# EAGLE board Quad-4layer (EAGLE 9.5.1)
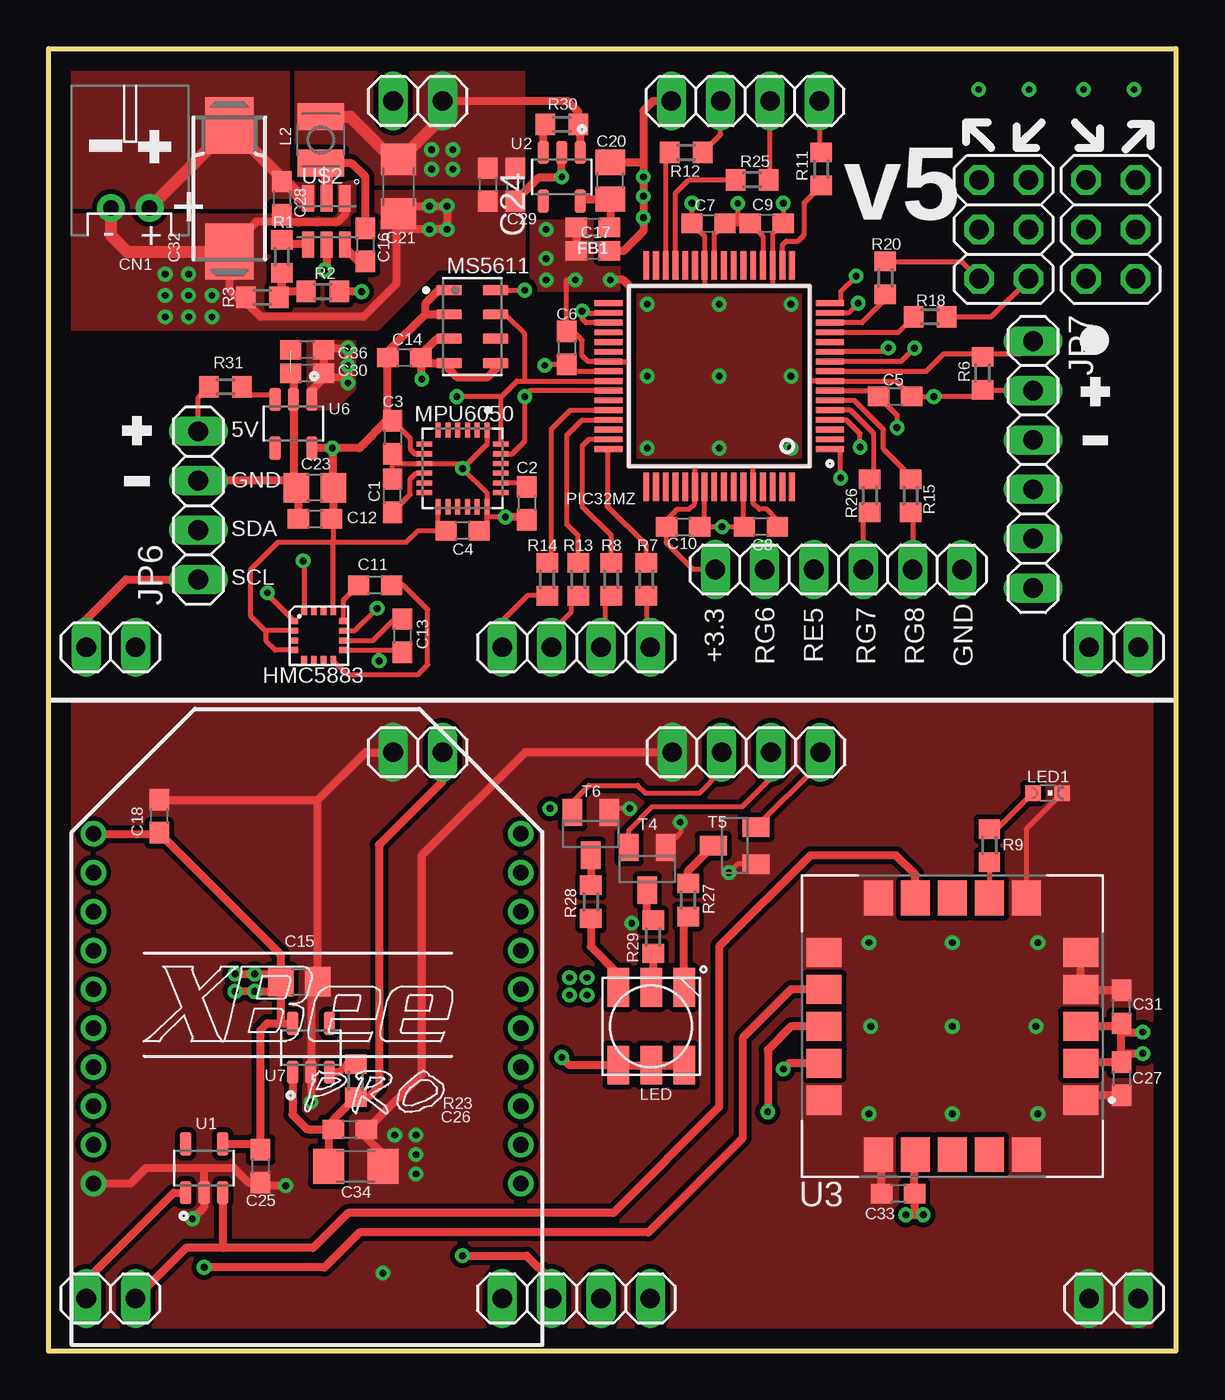
[diagram p0: board, top side]
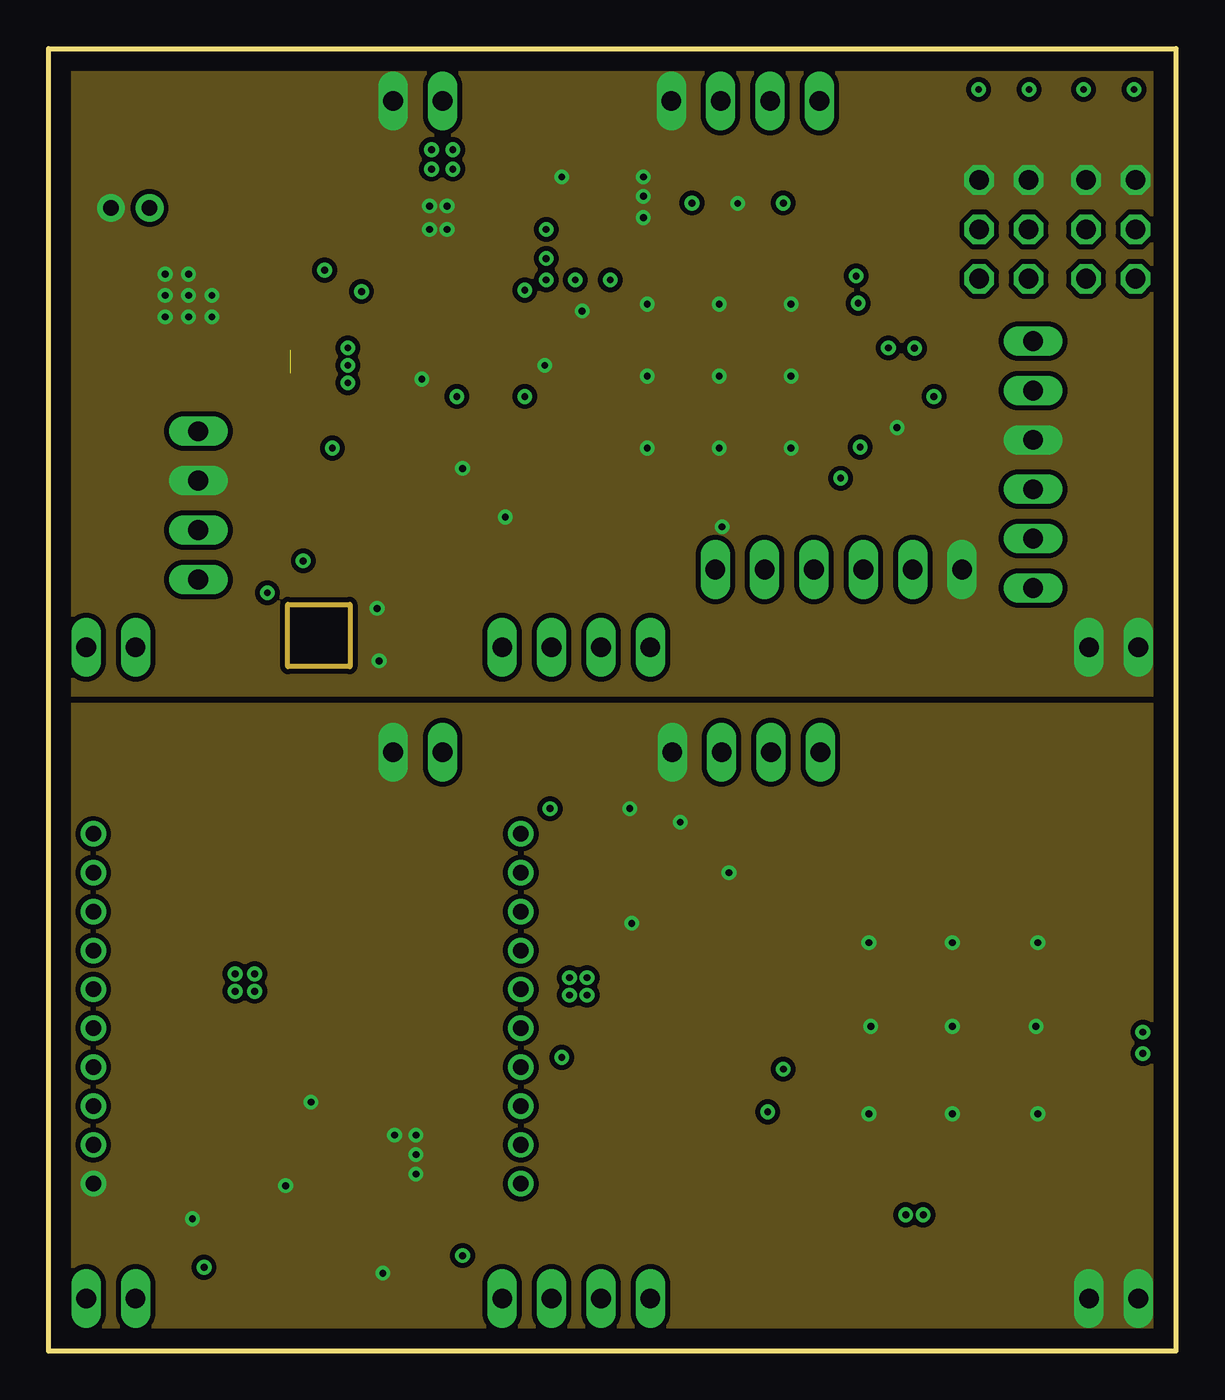
[diagram p1: board, inner layer GND]
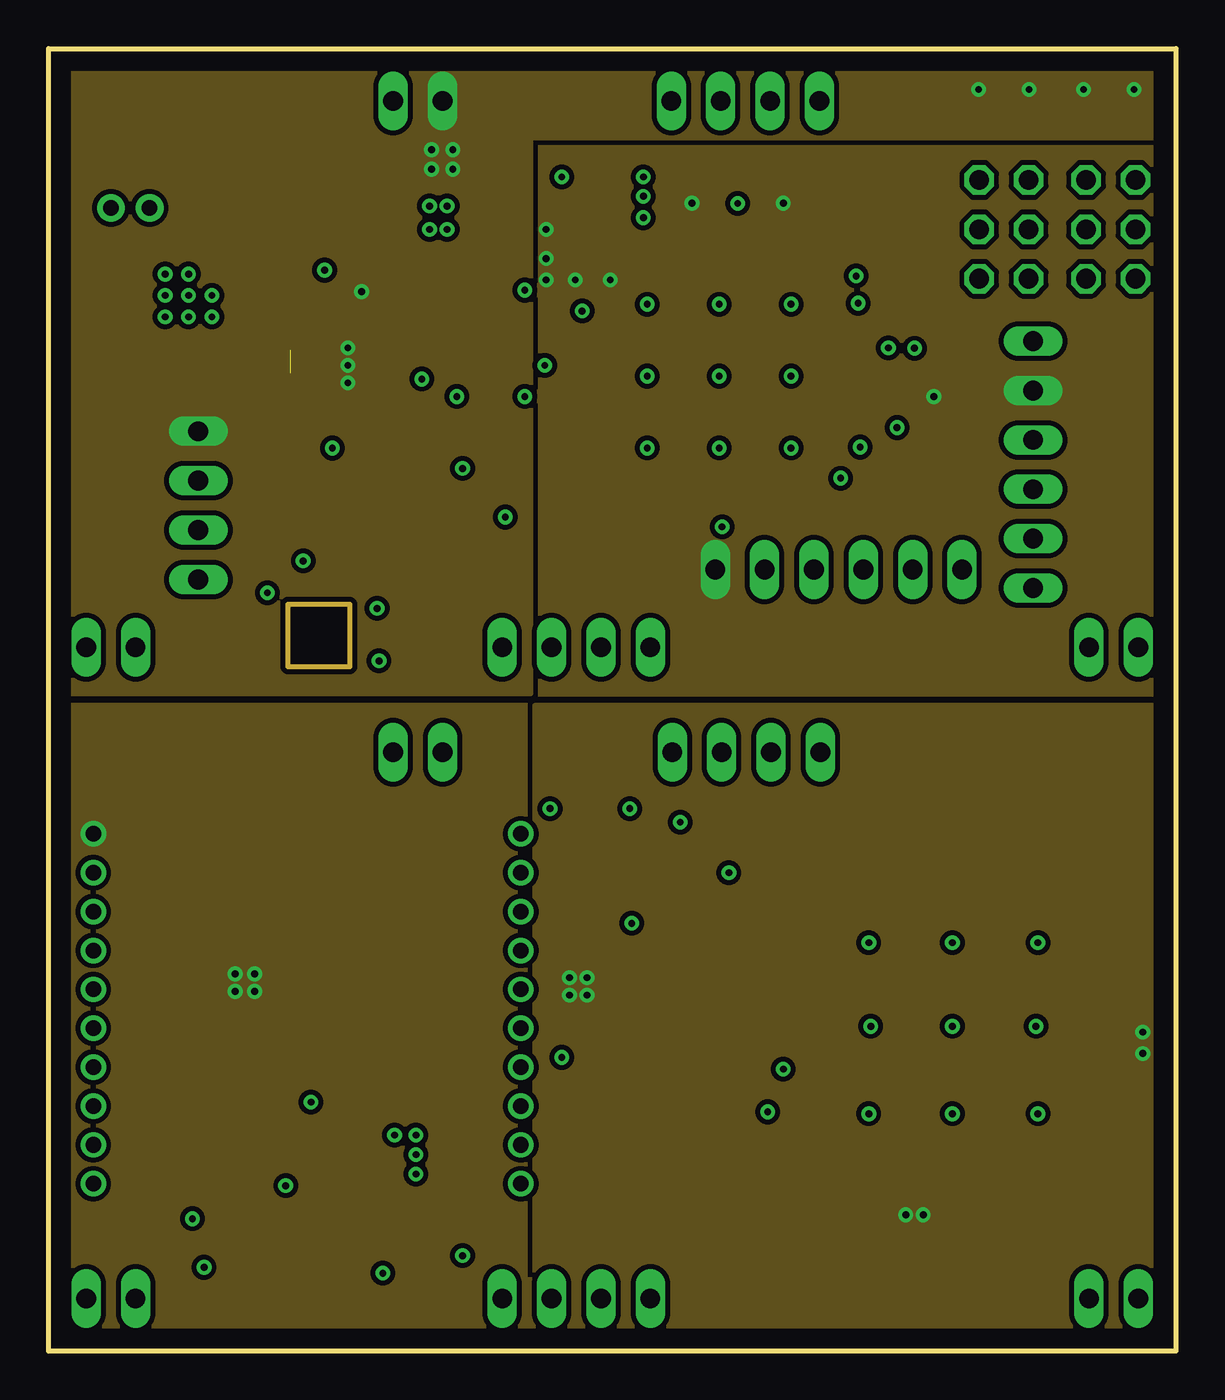
[diagram p2: board, inner layer VDD]
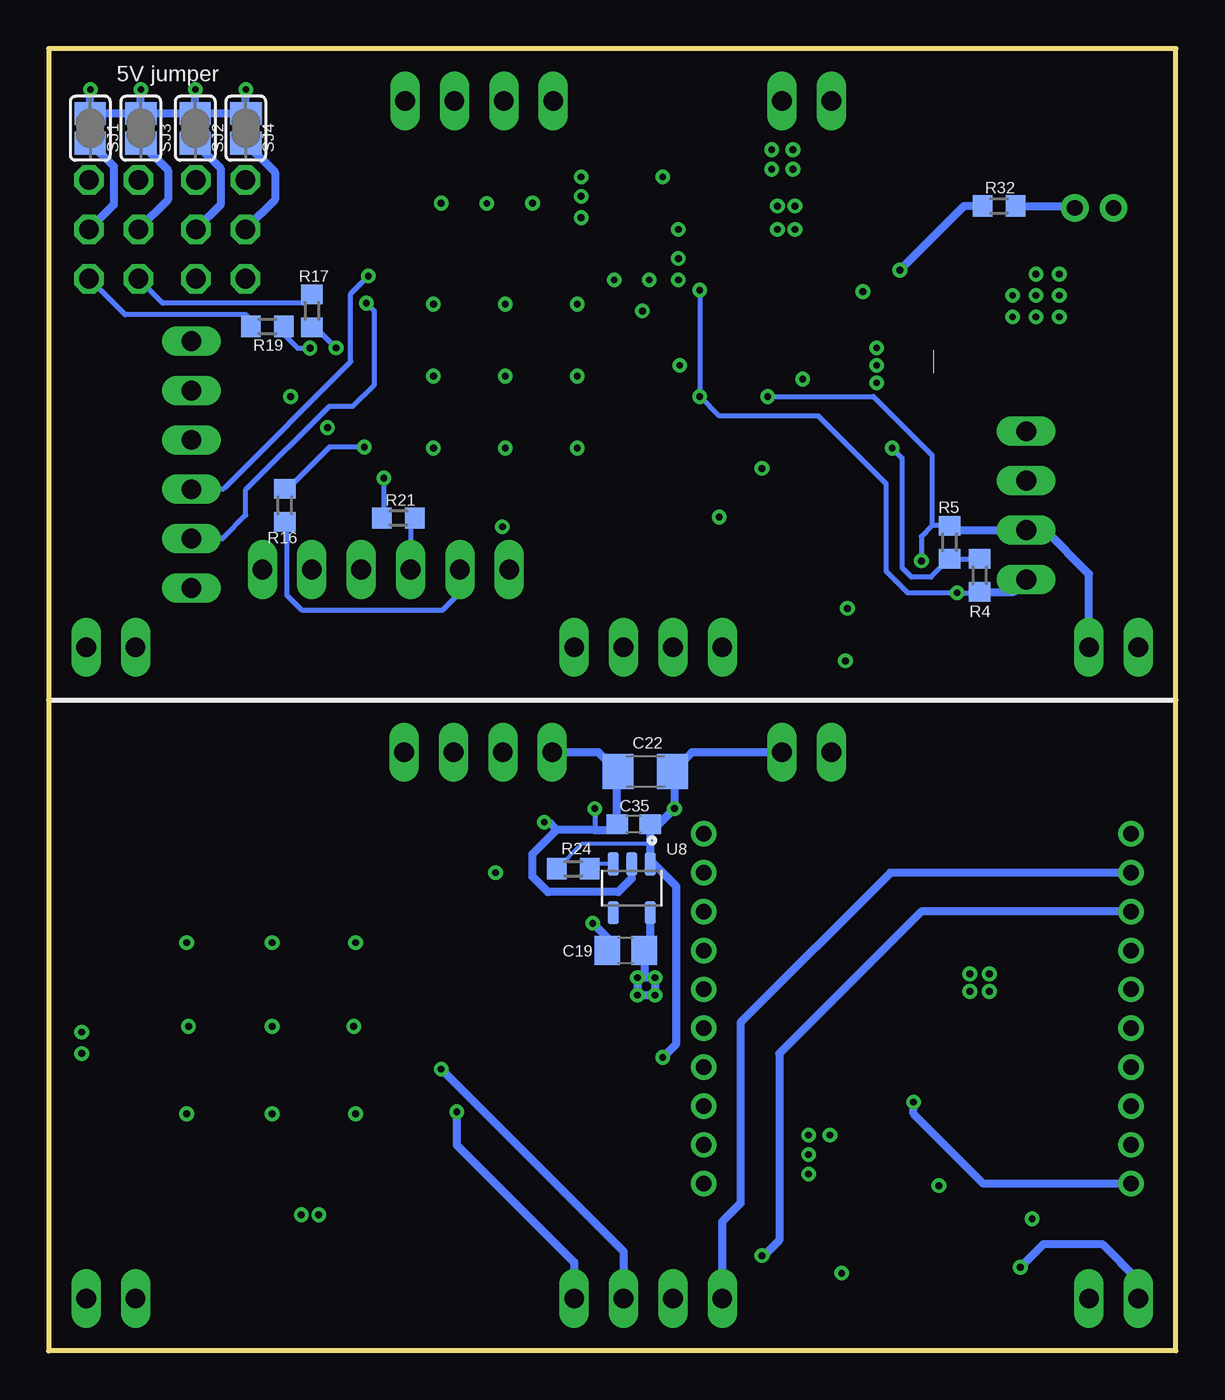
[diagram p3: board, bottom side, seen from below]

Size 58 x 67 mm. Coordinates in mm from the lower left corner, seen from the top.
Outline: 0,0 0,67 58,67 58,0 0,0
Copper layers (1*2+15*16): Top 0.035mm / dielectric 0.2mm / GND 0.0175mm / dielectric 1.065mm / VDD 0.0175mm / dielectric 0.2mm / Bottom 0.035mm
Design rules "default *": minimum track width 6mil, minimum drill 0.35mm, track to track 6mil, track to pad 6mil, pad to pad 6mil, via to via 6mil, smd to smd 6mil, copper to edge 40mil, drill to drill 6mil, minimum pad ring 10mil, minimum via ring 8mil, stop-mask expansion 4mil, vias tented up to drill 0mil, thermal gap 10mil

## Footprints (pad centres in the part's own frame; a part is rotated, then mirrored left to right if it is on the bottom)
C0603 = smd 1.1 x 1: 1 -0.85,0; 2 0.85,0
C0805 = smd 1.3 x 1.5: 1 -0.95,0; 2 0.95,0
C1206 = smd 1.6 x 1.8: 1 -1.4,0; 2 1.4,0
085CS_1AR = smd 2.9 x 2.5: + 3.25,0; - -3.25,0
JST-PH-2-THM-RA = drill 0.8 pad 1.422: 1 1,0; 2 -1,0
0603 = smd 1.1 x 1: 1 -0.85,0; 2 0.85,0
LPCC-16 = smd 0.45 x 0.3: 1 -1.275,0.75; 2 -1.275,0.25; 3 -1.275,-0.25; 4 -1.275,-0.75; 9 1.275,-0.75; 10 1.275,-0.25; 11 1.275,0.25; 12 1.275,0.75 | smd 0.3 x 0.45: 5 -0.75,-1.275; 6 -0.25,-1.275; 7 0.25,-1.275; 8 0.75,-1.275; 13 0.75,1.275; 14 0.25,1.275; 15 -0.25,1.275; 16 -0.75,1.275
1X04 = drill 1.016 long: 1 -3.81,0; 2 -1.27,0; 3 1.27,0; 4 3.81,0
1X02 = drill 1.016 long: 1 -1.27,0; 2 1.27,0
2X03 = drill 1.016 octagon: 1 -2.54,-1.27; 2 -2.54,1.27; 3 0,-1.27; 4 0,1.27; 5 2.54,-1.27; 6 2.54,1.27
1X06 = drill 1.016 long: 1 -6.35,0; 2 -3.81,0; 3 -1.27,0; 4 1.27,0; 5 3.81,0; 6 6.35,0
L2825P = smd 1.4 x 2.4: 1 -1.2,0; 2 1.2,0
RGBLED5050 = smd 2 x 1.1: 1 -2,1.7; 2 -2,0; 3 -2,-1.7; 4 2,-1.7; 5 2,0; 6 2,1.7
CHIPLED_0603 = smd 0.8 x 0.8: A 0,-0.75; C 0,0.75
QFN50P400X400X95-24N = smd 0.79 x 0.26: 1 -1.97,1.25; 2 -1.97,0.75; 3 -1.97,0.25; 4 -1.97,-0.25; 5 -1.97,-0.75; 6 -1.97,-1.25; 13 1.97,-1.25; 14 1.97,-0.75; 15 1.97,-0.25; 16 1.97,0.25; 17 1.97,0.75; 18 1.97,1.25 | smd 0.26 x 0.79: 7 -1.25,-1.97; 8 -0.75,-1.97; 9 -0.25,-1.97; 10 0.25,-1.97; 11 0.75,-1.97; 12 1.25,-1.97; 19 1.25,1.97; 20 0.75,1.97; 21 0.25,1.97; 22 -0.25,1.97; 23 -0.75,1.97; 24 -1.25,1.97
SON125P500X300X100-8N = smd 1.31 x 0.53: 1 -1.2,1.875; 2 -1.2,0.625; 3 -1.2,-0.625; 4 -1.2,-1.875; 5 1.2,-1.875; 6 1.2,-0.625; 7 1.2,0.625; 8 1.2,1.875
QFP50P1200X1200X120-64N = smd 1.45 x 0.3: 1 -5.7,3.75; 2 -5.7,3.25; 3 -5.7,2.75; 4 -5.7,2.25; 5 -5.7,1.75; 6 -5.7,1.25; 7 -5.7,0.75; 8 -5.7,0.25; 9 -5.7,-0.25; 10 -5.7,-0.75; 11 -5.7,-1.25; 12 -5.7,-1.75; 13 -5.7,-2.25; 14 -5.7,-2.75; 15 -5.7,-3.25; 16 -5.7,-3.75; 33 5.7,-3.75; 34 5.7,-3.25; 35 5.7,-2.75; 36 5.7,-2.25; 37 5.7,-1.75; 38 5.7,-1.25; 39 5.7,-0.75; 40 5.7,-0.25; 41 5.7,0.25; 42 5.7,0.75; 43 5.7,1.25; 44 5.7,1.75; 45 5.7,2.25; 46 5.7,2.75; 47 5.7,3.25; 48 5.7,3.75 | smd 0.3 x 1.45: 17 -3.75,-5.7; 18 -3.25,-5.7; 19 -2.75,-5.7; 20 -2.25,-5.7; 21 -1.75,-5.7; 22 -1.25,-5.7; 23 -0.75,-5.7; 24 -0.25,-5.7; 25 0.25,-5.7; 26 0.75,-5.7; 27 1.25,-5.7; 28 1.75,-5.7; 29 2.25,-5.7; 30 2.75,-5.7; 31 3.25,-5.7; 32 3.75,-5.7; 49 3.75,5.7; 50 3.25,5.7; 51 2.75,5.7; 52 2.25,5.7; 53 1.75,5.7; 54 1.25,5.7; 55 0.75,5.7; 56 0.25,5.7; 57 -0.25,5.7; 58 -0.75,5.7; 59 -1.25,5.7; 60 -1.75,5.7; 61 -2.25,5.7; 62 -2.75,5.7; 63 -3.25,5.7; 64 -3.75,5.7
R0603 = smd 1 x 1.1: 1 -0.85,0; 2 0.85,0
SJ = smd 1.168 x 1.6: 1 -0.762,0; 2 0.762,0
SOT23-EBC = smd 1 x 1.4: B 0.95,-1.1; C 0,1.1; E -0.95,-1.1
SOT95P280X145-5N = smd 1.21 x 0.59: 1 -1.255,0.95; 2 -1.255,0; 3 -1.255,-0.95; 4 1.255,-0.95; 5 1.255,0.95
XCVR_SAM-M8Q = smd 1.8 x 1.5: 1 -6.6,3.8; 2 -6.6,1.9; 3 -6.6,0; 4 -6.6,-1.9; 5 -6.6,-3.8; 11 6.6,-3.8; 12 6.6,-1.9; 13 6.6,0; 14 6.6,1.9; 15 6.6,3.8 | smd 1.5 x 1.8: 6 -3.8,-6.6; 7 -1.9,-6.6; 8 0,-6.6; 9 1.9,-6.6; 10 3.8,-6.6; 16 3.8,6.6; 17 1.9,6.6; 18 0,6.6; 19 -1.9,6.6; 20 -3.8,6.6
SOT95P280X140-6N = smd 1.35 x 0.6: 1 -1.185,0.95; 2 -1.185,0; 3 -1.185,-0.95; 4 1.185,-0.95; 5 1.185,0; 6 1.185,0.95
XBEE-PRO = drill 0.8 pad 1.27: 1 -11,9; 2 -11,7; 3 -11,5; 4 -11,3; 5 -11,1; 6 -11,-1; 7 -11,-3; 8 -11,-5; 9 -11,-7; 10 -11,-9; 11 11,-9; 12 11,-7; 13 11,-5; 14 11,-3; 15 11,-1; 16 11,1; 17 11,3; 18 11,5; 19 11,7; 20 11,9

## Placement (x,y rotation side)
C1  0.1uF  [C0603]  17.7,44 90 top
C2  2.2nF  [C0603]  24.6,43.6 270 top
C3  10nF  [C0603]  17.7,47 270 top
C4  0.1uF  [C0603]  21.3,42.2 0 top
C5  0.1uF  [C0603]  43.55,49.1 180 top
C6  0.1uF  [C0603]  26.65,51.6 270 top
C7  0.1uF  [C0603]  33.95,58 0 top
C8  0.1uF  [C0603]  36.65,42.4 180 top
C9  0.1uF  [C0603]  36.95,58 180 top
C10  0.1uF  [C0603]  32.65,42.4 0 top
C11  0.22uF  [C0603]  16.8,39.4 180 top
C12  0.1uF  [C0603]  13.7,42.8 180 top
C13  4.7uF  [C0603]  18.2,36.8 270 top
C14  0.1uF  [C0603]  18.3,51.1 0 top
C15  1uF  [C0805]  12.9,19 0 top
C16  0.1uF  [C0603]  16.3,56.9 270 top
C17  0.1uF  [C0603]  28,56.6 0 top
C18  0.1uF  [C0603]  5.7,27.5 90 top
C19  1uF  [C0805]  28.3,20.6 180 bottom
C20  1uF  [C0805]  28.9,60.2 90 top
C21  10uF  [C1206]  18,59.9 270 top
C22  10uF  [C1206]  27.3,29.8 180 bottom
C23  1uF  [C0805]  13.7,44.4 180 top
C24  0.1uF  [C0603]  22.6,60 270 top
C25  0.1uF  [C0603]  10.9,9.5 270 top
C26  0.1uF  [C0603]  15.5,11.4 0 top
C27  0.1uF  [C0603]  55.2,14 270 top
C28  0.1uF  [C0603]  12,59.3 270 top
C29  0.1uF  [C0603]  24,60 270 top
C30  0.1uF  [C0603]  13.3,50.3 180 top
C31  0.1uF  [C0603]  55.2,17.7 90 top
C32  [085CS_1AR]  9.3,59.8 90 top
C33  0.1uF  [C0603]  43.7,8.1 180 top
C34  10uF  [C1206]  15.8,9.5 0 top
C35  0.1uF  [C0603]  27.9,27.1 180 bottom
C36  0.1uF  [C0603]  13.3,51.5 180 top
CN1  [JST-PH-2-THM-RA]  4.2,58.8 0 top
FB1  30Ω/1.8A  [0603]  28,57.8 180 top
HMC5883  HMC5883L  [LPCC-16]  13.9,36.8 0 top
JP1  [1X04]  27.15,2.7 0 top
JP2  [1X02]  3.2,36.2 180 top
JP4  [2X03]  49.15,57.7 90 top
JP5  [2X03]  54.65,57.7 90 top
JP6  [1X04]  7.7,43.5 90 top
JP7  [1X06]  50.65,45.6 270 top
JP8  [1X04]  35.9,30.8 180 top
JP9  [1X04]  35.85,64.3 180 top
JP10  [1X02]  19,64.3 180 top
JP11  [1X04]  27.15,36.2 0 top
JP12  [1X02]  3.2,2.7 180 top
JP13  [1X02]  19,30.8 180 top
JP14  [1X02]  54.8,2.7 0 top
JP15  [1X02]  54.8,36.2 0 top
JP16  [1X06]  40.65,40.2 180 top
L2  4.7uH  [L2825P]  14,62.3 270 top
LED  RGBLED5050  [RGBLED5050]  31,16.7 90 top
LED1  [CHIPLED_0603]  51.4,28.7 270 top
MPU6050  MPU-6050  [QFN50P400X400X95-24N]  21.3,45.4 270 top
MS5611  MS561101BA03-50  [SON125P500X300X100-8N]  21.8,52.7 0 top
PIC32MZ  PIC32MZ2048EFH064-I/PT  [QFP50P1200X1200X120-64N]  34.5,50.15 180 top
R1  75k  [R0603]  12,56.3 270 top
R2  41k  [R0603]  14.1,54.5 0 top
R3  7.6k  [R0603]  11,54.2 0 top
R4  4.7k  [R0603]  10.1,39.9 90 bottom
R5  4.7k  [R0603]  11.65,41.6 270 bottom
R6  1k  [R0603]  48.05,50.3 270 top
R7  33  [R0603]  30.75,39.7 90 top
R8  33  [R0603]  28.95,39.7 90 top
R9  1k  [R0603]  48.4,26 270 top
R11  33  [R0603]  39.75,60.8 90 top
R12  33  [R0603]  32.8,61.65 0 top
R13  33  [R0603]  27.25,39.7 90 top
R14  33  [R0603]  25.65,39.7 90 top
R15  33  [R0603]  44.35,44 270 top
R16  33  [R0603]  45.85,43.5 270 bottom
R17  33  [R0603]  44.45,53.5 90 bottom
R18  33  [R0603]  45.35,53.2 0 top
R19  33  [R0603]  46.75,52.7 180 bottom
R20  33  [R0603]  43.05,55.2 90 top
R21  33  [R0603]  40,42.85 0 bottom
R23  10k  [R0603]  15.8,13.9 270 top
R24  10k  [R0603]  31,24.8 180 bottom
R25  33  [R0603]  36.2,60.25 0 top
R26  33  [R0603]  42.25,44 270 top
R27  330  [R0603]  32.9,23.2 270 top
R28  330  [R0603]  27.9,23.1 270 top
R29  220  [R0603]  31.1,21.3 270 top
R30  10k  [R0603]  26.4,63.1 0 top
R31  10k  [R0603]  9.1,49.6 180 top
R32  10k  [R0603]  9.1,58.9 0 bottom
SJ1  [SJ]  55.85,62.9 90 bottom
SJ2  [SJ]  50.45,62.9 90 bottom
SJ3  [SJ]  53.25,62.9 90 bottom
SJ4  [SJ]  47.85,62.9 90 bottom
T4  [SOT23-EBC]  30.8,24.8 180 top
T5  [SOT23-EBC]  35.3,26 90 top
T6  [SOT23-EBC]  27.9,26.6 180 top
U1  CAT24C02  [SOT95P280X145-5N]  8,9.4 90 top
U2  TLV75533PDBVR  [SOT95P280X145-5N]  26.4,60.4 270 top
U3  SAM-M8Q  [XCVR_SAM-M8Q]  46.5,16.7 180 top
U6  TLV75533PDBVR  [SOT95P280X145-5N]  12.6,47.7 270 top
U7  TLV75533PDBVR  [SOT95P280X145-5N]  13.5,15.6 90 top
U8  TLV75533PDBVR  [SOT95P280X145-5N]  28,23.8 270 bottom
U$2  AP65211A  [SOT95P280X140-6N]  14.3,58.1 270 top
XB2  XBEE-PRO  [XBEE-PRO]  13.3,17.6 0 top

## Library data of the parts
C1-C36 = rcl; SPICEPREFIX: C
CN1 LED LED1 = adafruit
FB1 = SparkFun-Coils; PROD_ID: NDUC-07859
HMC5883 = HMC5883L; AVAILABILITY: Unavailable; DESCRIPTION: Digital Compass +/- 0.8g, Lcc-16; MF: Honeywell Aerospace; MP: HMC5883L-T; PACKAGE: LCC-16 Honeywell; PRICE: None
JP1 JP2 JP4-JP16 = pinhead
L2 = rcl; SPICEPREFIX: L
MPU6050 = MPU-6050; AVAILABILITY: Unavailable; DESCRIPTION: 3-axis gyroscope, 3-axis accelerometer in a 4x4x0.9 housing; MF: TDK InvenSense; MP: MPU-6050; PACKAGE: QFN-24 InvenSense; PRICE: None
MS5611 = MS561101BA03-50; AVAILABILITY: Unavailable; DESCRIPTION: Pressure Sensor 1.44V to 3.6V 0.01bar to 1.2bar Absolute 8-Pin QFN T/R; MF: TE Connectivity; MP: MS561101BA03-50; PACKAGE: SMD-8 Measurement Specialties; PRICE: None
PIC32MZ = PIC32MZ2048EFH064-I_PT; DESCRIPTION: PIC32MZ Series 2 MB Flash 512 kB RAM 200 MHz 32-Bit Microcontroller - TQFP-64; DIGI-KEY_PART_NUMBER: PIC32MZ2048EFH064-I/PT-ND; DIGI-KEY_PURCHASE_URL: https://www.digikey.com/product-detail/en/microchip-technology/PIC32MZ2048EFH064-I-PT/PIC32MZ2048EFH064-I-PT-ND/5323563?utm_source=snapeda&utm_medium=aggregator&utm_campaign=symbol; MF: Microchip; MP: PIC32MZ2048EFH064-I/PT; PACKAGE: TQFP-64 Microchip
R1-R9 R11-R21 R23-R32 = rcl; SPICEPREFIX: R
SJ1-SJ4 = jumper
T4-T6 = transistor
U1 = CAT24C02; AVAILABILITY: Unavailable; DESCRIPTION: 500mA Low-IQ Small-Size Low-Dropout _LDO_ Regulator 5-SOT-23 -40 to 125; MF: Texas Instruments; MP: TLV75533PDBVR; PACKAGE: SOT-23 Texas Instruments; PRICE: None
U2 U6-U8 = TLV75533PDBVR; AVAILABILITY: Unavailable; DESCRIPTION: 500mA Low-IQ Small-Size Low-Dropout _LDO_ Regulator 5-SOT-23 -40 to 125; MF: Texas Instruments; MP: TLV75533PDBVR; PACKAGE: SOT-23 Texas Instruments; PRICE: None
U3 = SAM-M8Q; AVAILABILITY: Unavailable; DESCRIPTION: u-Blox M8 Gnss Antenna Module; MF: U-Blox America; MP: SAM-M8Q; PACKAGE: SMD-20 U-Blox America; PRICE: None
U$2 = SOT95P280X140-6N
XB2 = maxstream; MPN: XBP24-AWI-001; OC_FARNELL: 1337916; OC_NEWARK: 42M2667

## Nets
+3V3: C5.1 C6.1 C7.1 C8.1 C9.1 C10.1 C17.1 FB1.2 JP7.2 JP16.6 PIC32MZ.8 PIC32MZ.19 PIC32MZ.26 PIC32MZ.39 PIC32MZ.54 PIC32MZ.60 R6.2
+5V: C21.1 C24.1 C29.1 C30.1 C36.1 JP6.4 JP10.1 L2.1 R2.2 R30.2 R31.2 SJ1.2 SJ2.2 SJ3.2 SJ4.2 U2.1 U6.1
+5V/1: C22.1 C26.1 C34.1 C35.1 JP13.1 LED.1 LED.2 LED.3 R23.2 R24.2 U7.1 U8.1
+12V: C28.1 C32.+ CN1.1 R32.2 U$2.3
DGND: C15.2 C18.2 C19.2 C22.2 C25.2 C26.2 C27.2 C31.2 C33.2 C34.2 C35.2 JP8.4 JP13.2 JP14.1 JP14.2 LED1.C T4.E T5.E T6.E U1.2 U3.1 U3.4 U3.5 U3.6 U3.10 U3.11 U3.15 U3.16 U3.20 U7.2 U8.2 XB2.10
ESC_1: JP5.1 R19.2
ESC_2: JP5.2 R17.2
ESC_3: JP4.1 R18.2
ESC_4: JP4.2 R20.2
GND: C1.2 C2.2 C3.2 C4.2 C5.2 C6.2 C7.2 C8.2 C9.2 C10.2 C12.2 C13.2 C14.2 C17.2 C20.2 C21.2 C23.2 C24.2 C28.2 C29.2 C30.2 C32.- C36.2 CN1.2 HMC5883.9 HMC5883.11 JP4.5 JP4.6 JP5.5 JP5.6 JP6.3 JP7.3 JP9.4 JP10.2 JP15.1 JP15.2 JP16.1 MPU6050.1 MPU6050.9 MPU6050.18 MS5611.3 MS5611.4 MS5611.5 PIC32MZ.7 PIC32MZ.20 PIC32MZ.25 PIC32MZ.34 PIC32MZ.35 PIC32MZ.40 PIC32MZ.55 PIC32MZ.59 R3.1 U2.2 U6.2 U$2.1
GPIO1: JP16.5 R16.2
GPIO2: JP16.4 R21.2
GPIO3: JP16.3 R26.2
GPIO4: JP16.2 R15.2
GPS_RX: JP11.1 R14.1
GPS_RX_J: JP1.3 U3.14
GPS_TX: JP11.2 R13.1
GPS_TX_J: JP1.4 U3.13
LED_BLUE: JP9.1 R11.2
LED_BLUE1: JP8.1 T5.B
LED_GREEN: JP9.3 R12.2
LED_GREEN1: JP8.2 T4.B
LED_RED: JP9.2 R25.2
MCLR: JP7.1 PIC32MZ.9 R6.1
N$1: C1.1 MPU6050.10
N$2: C2.1 MPU6050.20
N$3: C11.1 HMC5883.8
N$4: C11.2 HMC5883.12
N$5: LED.5 R29.2
N$6: C13.1 HMC5883.10
N$7: LED.6 R28.2
N$8: C16.1 L2.2 U$2.2
N$9: C16.2 U$2.6
N$10: R1.1 U$2.4
N$11: R1.2 R2.1 R3.2
N$12: PIC32MZ.48 R7.2
N$13: PIC32MZ.47 R8.2
N$14: R9.2 U3.7
N$15: LED.4 R27.2
N$16: LED1.A R9.1
N$17: PIC32MZ.18 R11.1
N$18: PIC32MZ.45 R13.2
N$19: PIC32MZ.44 R14.2
N$20: PIC32MZ.29 R25.1
N$21: PIC32MZ.4 R16.1
N$22: PIC32MZ.1 R21.1
N$23: PIC32MZ.11 R17.1
N$24: PIC32MZ.13 R18.1
N$25: PIC32MZ.10 R19.1
N$26: PIC32MZ.14 R20.1
N$27: R23.1 U7.3
N$28: R24.1 U8.3
N$29: JP4.4 SJ4.1
N$30: PIC32MZ.5 R26.1
N$31: PIC32MZ.6 R15.1
N$32: R31.1 U6.3
N$33: R30.1 U2.3
N$34: PIC32MZ.30 R12.1
N$35: JP8.3 T6.B
N$36: R32.1 U$2.5
N$39: C20.1 FB1.1 U2.5
N$40: JP5.3 SJ1.1
N$41: JP4.3 SJ2.1
N$42: R28.1 T6.C
N$43: R29.1 T4.C
N$44: R27.1 T5.C
N$45: JP5.4 SJ3.1
PGC: JP7.5 PIC32MZ.15
PGD: JP7.4 PIC32MZ.16
SCL: HMC5883.1 JP2.2 JP6.1 MPU6050.23 MS5611.8 PIC32MZ.42 R4.1
SCL_J: JP12.2 U1.1 U3.12
SDA: HMC5883.16 JP2.1 JP6.2 MPU6050.24 MS5611.7 PIC32MZ.41 R5.1
SDA_J: JP12.1 U1.3 U3.9
V+: C15.1 C18.1 C25.1 U1.4 U7.5 XB2.1
VBUS: PIC32MZ.33
VCC: C3.1 C4.1 C12.1 C14.1 C23.1 HMC5883.2 HMC5883.4 HMC5883.13 MPU6050.8 MPU6050.13 MS5611.1 MS5611.2 R4.2 R5.2 U6.5
VDD: C19.1 C27.1 C31.1 C33.1 U3.2 U3.3 U3.17 U8.5
XBEE_RX: JP11.3 R8.1
XBEE_RX_J: JP1.2 XB2.3
XBEE_TX: JP11.4 R7.1
XBEE_TX_J: JP1.1 XB2.2

## Tracks (layer width: path | path; a pad name or v marks a point on that pad's centre or on a via)
+3V3  (via drill 0.35)
  Top 0.254: C9.1 37.8,58.35 | 33.1,58.25 C7.1 | 26.8,52.45 C6.1 | C8.1 37.5,42.75 36.95,43.3 36.55,43.3 36.25,43.6 PIC32MZ.60 36.25,45.5 | JP16.6 33.15,40.2 31.8,41.55 C10.1 31.8,42.75 32.35,43.3 32.95,43.3 33.25,43.6 PIC32MZ.54 33.25,45.5 | C6.1 27,52.45 27.45,52 27.45,51.2 27.75,50.9 PIC32MZ.39 29.85,50.9 | 33.75,54.8 PIC32MZ.26 33.75,57.35 C7.1 | 33.75,54.8 37.25,54.8 | 37.25,54.8 39.15,54.8 39.15,49.9 | 39.15,49.9 39.15,45.5 36.25,45.5 | 36.25,45.5 33.25,45.5 | 33.25,45.5 29.85,45.5 29.85,50.9 | 29.85,50.9 29.85,54.8 33.75,54.8 | 39.15,49.9 PIC32MZ.8 43.6,49.9 C5.1 v45.55,49.1 47.7,49.1 47.95,49.35 48.01,49.41 | 37.25,54.8 PIC32MZ.19 37.25,57.45 C9.1 | 48.09,49.41 R6.2 48.01,49.41 | v37.8,59.05 C9.1 | C7.1 v33.1,59.05 | C6.1 26.65,55.1 v27.1,55.1 | JP7.2 48.01,49.41
  Top 0.406: FB1.2 C17.1 | 29.85,54.8 29.55,55.1 v28.9,55.1
  other vias: 25.6,57.7 25.6,56.2 25.6,55.1
  pour VDD (isolate 0.254, rank 2, no thermals): 24.8,62.4 24.8,33.8 58,33.8 58,62.4
  pour Top (isolate 0.254, rank 3, no thermals): 24.9,58.1 29.3,58.1 29.3,54.6 24.9,54.6
+5V  (via drill 0.35)
  Top 0.254: JP6.4 7.7,49.05 R31.2
  Top 0.406: v16.1,54.5 R2.2 | C30.1 14.1,50.35 | U6.1 13.55,49.45 14.15,50.05 C30.1 | U2.1 27.35,63.1 R30.2 27.25,63.75 26.7,64.3 JP10.1 | C30.1 C36.1 14.25,51.6 v15.4,51.6 v15.4,50.7 15.4,50.1 | 15.4,50.1 v15.4,49.8 | C30.1 14.35,50.1 15.4,50.1
  Top 0.61: L2.1 15.53,63.5 17.62,61.4 | JP10.1 20.27,63.47 18.2,61.4
  Bottom 0.406: SJ2.2 SJ4.2 v47.85,64.9 | SJ2.2 SJ3.2 | SJ3.2 SJ1.2 v55.85,64.9 | SJ2.2 v50.45,64.9 | SJ3.2 v53.25,64.9
  other vias: 19.7,61.8 20.8,61.8 19.7,60.8 20.8,60.8
  pour VDD (isolate 0.254, no thermals): 0,33.8 0,67 58,67 58,62.4 24.8,62.4 24.8,33.8
  pour Top (isolate 0.254, rank 2, no thermals): 12.3,67 12.3,60.1 24.4,60.1 24.4,67
  pour Top (isolate 0.254, no thermals): 13.4,51.9 15.7,51.9 15.7,49.5 14.7,48.5 13.4,48.5
+5V/1  (via drill 0.35)
  Top 0.254: C34.1 14.18,9.73
  Top 0.406: JP13.1 20.27,29.3 17,26.03 17,13.6 16.45,13.05 R23.2 | 15.8,12.93 R23.2 | LED.3 LED.2 LED.1 26.8,14.7 v26.4,15.1 | U7.1 12.55,12.15 13.3,11.4 C26.1 | R23.2 14.65,11.9 C26.1 | C26.1 14.4,11.15 C34.1
  Bottom 0.203: R24.2 30.55,26.1 27.05,26.1
  Bottom 0.406: 31.85,25.15 R24.2 | v25.8,27.9 25.77,27.9 | v26.4,15.1 25.7,15.8 25.7,23.9 26.86,25.05 U8.1 27.05,26.1 27.05,26.65 26.75,26.95 | v25.8,27.9 26.75,26.95 | JP13.1 24.9,30.8 C22.1 25.8,29.7 v25.8,27.9 | C35.1 26.9,26.95 26.75,26.95
+12V
  Top 0.61: U$2.3 13.05,59.28 12.19,60.15 C28.1 12,60.35 C32.+ 9.3,62.9 CN1.1
  Bottom 0.406: R32.2 5.3,58.9 CN1.1
  pour Top (isolate 0.254, no thermals): 0,67 0,58.9 13.7,58.9 13.7,60.1 12.3,60.1 12.3,67
DGND  (via drill 0.35)
  Top 0.254: 36.95,25.05 T5.E 35.45,25.05 v35,24.6 | 32.09,30.11 JP8.4 | T6.E 29.05,27.9 v29.9,27.9 | v32.5,27.2 32.5,26.65 T4.E | LED1.C 50.3,26.85 U3.6
  Top 0.406: v13.5,12.8 U7.2 13.5,18.65 C15.2 13.85,28.35 | JP8.4 24.5,30.8 19.2,25.5 19.2,14.2 16.4,11.4 C26.2 16.35,10.95 17.2,10.1 C34.2 | v12.2,8.5 11.05,8.5 C25.2 10.3,8.65 9.55,9.4 8,9.4 | T5.E 36.1,25.05 | C18.2 13.85,28.35 | 8,9.4 U1.2 8,7.4 v7.4,6.8 | 8,9.4 5,9.4 4.2,8.6 XB2.10 | C33.2 42.85,9.95 U3.16 | C27.2 53.35,13.15 U3.1 | C31.2 53.15,18.55 U3.4 U3.5 | 13.85,28.35 16.3,30.8 JP13.2
  Bottom 0.254: v29.9,27.9 29.9,26.8
  Bottom 0.406: v13.5,12.8 13.5,12.2 9.9,8.6 XB2.10 | U8.2 28,24.3 28.7,23.6 32.3,23.6 33.1,24.4 33.1,25.56 31.86,26.8 | v30,22 29.1,21.1 29.25,21.1 C19.2 | 12.1,8.6 v12.2,8.5 | 31.86,26.8 29.9,26.8 29.05,26.8 C35.2 | JP8.4 29.7,30.8 C22.2 28.75,29.75 C35.2 | 29.05,27.25 28.9,27.25 C35.2 | v32.5,27.2 32.26,27.2 31.86,26.8
  other vias: 42.3,16.7 42.2,21 46.5,21 50.9,21 50.8,16.7 46.5,12.2 42.2,12.2 50.9,12.2 46.5,16.7 17.2,4 17.8,11.1 18.9,11.1 18.9,10.1 18.9,9.1
  pour GND (isolate 0.254, no thermals): 0,33.2 0,0 58,0 58,33.2
  pour Top (isolate 0.254, no thermals): 0,33.2 0,0 58,0 58,33.2
ESC_1
  Bottom 0.254: R19.2 47.42,52.88 47.85,53.3 54.06,53.3 JP5.1
ESC_2
  Bottom 0.254: JP5.2 52.12,53.9 44.9,53.9 R17.2
ESC_3
  Top 0.254: R18.2 48.5,53.2 50.42,55.12 JP4.1
ESC_4
  Top 0.254: R20.2 46.99,56.05 JP4.2
GND  (via drill 0.35)  (1 unrouted)
  Top 0.254: HMC5883.9 17,36.05 | 17,36.05 18.1,36.05 C13.2 | HMC5883.11 15.75,37.05 v16.9,38.2 | v17,35.5 17,36.05 | v21.3,45.4 21.05,45.65 MPU6050.9 17.7,45.65 | MPU6050.1 22.55,46.65 v21.3,45.4 | v21.3,45.4 22.55,44.15 MPU6050.18 22.55,42.9 | C4.2 22.55,42.6 22.55,42.9 | C1.2 17.7,45.65 | 17.75,46.05 17.75,46.1 C3.2 17.7,45.65 | C10.2 33.7,42.6 | C10.2 v34.65,42.4 C8.2 | C8.2 35.7,42.5 | v23.5,42.9 22.55,42.9 | 35.45,58 C7.2 34.25,57.45 PIC32MZ.25 | 35.45,58 C9.2 36.75,57.35 PIC32MZ.20 | v35.45,59.04 35.45,58 | v25.53,50.7 25.58,50.75 C6.2 27,50.4 PIC32MZ.40 | PIC32MZ.34 27.55,53.4 v27.45,53.5 27.45,53.1 27.65,52.9 PIC32MZ.35 | C10.2 33.75,42.65 PIC32MZ.55 | C8.2 35.75,42.45 PIC32MZ.59 | PIC32MZ.7 42.4,49.4 C5.2 43.65,48.15 v43.65,47.5
  Top 0.406: C2.2 24.45,42.9 v23.5,42.9 | U$2.1 15.25,58.45 14.9,58.1 12.35,58.1 C28.2 11.65,58.1 10.7,58.1 9.3,56.7 C32.- 9.3,54.6 9.93,53.98 R3.1 10.15,53.95 10.9,53.2 16.2,53.2 17.9,54.9 17.9,58.2 18.1,58.2 18.1,57.7 v19.6,57.7 v20.5,57.7 v20.5,58.9 v19.6,58.9 18.4,58.9 | 19.27,50.98 C14.2 19.15,51.25 19.98,52.08 MS5611.3 | 19.27,50.98 19.43,50.83 MS5611.4 20.6,50.5 21,50.1 22.6,50.1 23,50.5 MS5611.5 | v19.2,50 19.2,50.9 19.27,50.98 | C23.2 12.85,44.3 C12.2 | C29.2 25.2,60.35 26.4,60.35 v26.4,60.4 U2.2 | C17.2 29.6,56.6 30.6,57.6 v30.6,58.3 v30.6,59.4 v30.6,60.4 30.6,61.2 | JP9.4 31.1,64.3 30.6,63.8 30.6,61.2 | 30.6,61.2 30.55,61.15 C20.2 | C23.2 12.38,44.77 JP6.3 | C23.2 12.6,44.55 U6.2 12.6,50.15 C30.2
  Top 0.61: CN1.2 3.2,57.4 4.05,56.55 C32.-
  other vias: 6,55.4 7.2,55.4 6,54.3 7.2,54.3 8.4,54.3 6,53.2 7.2,53.2 8.4,53.2 30.8,53.85 30.8,50.15 30.8,46.45 34.5,46.45 34.5,50.15 34.5,53.85 38.2,53.85 38.2,50.15 38.2,46.45
  pour GND (isolate 0.254, rank 2, no thermals): 0,33.8 58,33.8 58,67 0,67
  pour Top (isolate 0.254, rank 3, no thermals): 0,60.1 24.4,60.1 24.4,55.7 20,55.7 16.9,52.6 0,52.6
  pour Top (isolate 0.254, no thermals): 39.15,45.5 29.85,45.5 29.85,54.8 39.15,54.8
GPIO1
  Bottom 0.254: JP16.5 36.84,39.01 37.75,38.1 44.95,38.1 45.75,38.9 45.75,42.55 R16.2
GPIO2
  Bottom 0.254: R21.2 39.38,42.62 JP16.4
GPIO3
  Top 0.254: JP16.3 41.92,42.82 R26.2
GPIO4
  Top 0.254: R15.2 44.46,43.04 JP16.2
GPS_RX
  Top 0.254: R14.1 24.65,38.85 23.34,37.54 JP11.1
GPS_RX_J  (via drill 0.35)
  Top 0.406: U3.14 38.1,14.8 v37.8,14.5
  Bottom 0.406: v37.8,14.5 28.42,5.12 JP1.3
GPS_TX
  Top 0.254: JP11.2 25.88,37 26.88,38 26.88,38.85 R13.1
GPS_TX_J  (via drill 0.35)
  Top 0.406: U3.13 38.2,16.7 37,15.5 v37,12.3
  Bottom 0.406: v37,12.3 37,10.6 30.96,4.56 JP1.4
LED_BLUE
  Top 0.254: R11.2 39.66,61.74 JP9.1
LED_BLUE1
  Top 0.254: T5.B 39.71,30.26 JP8.1
LED_GREEN
  Top 0.254: R12.2 34.58,62.58 JP9.3
LED_GREEN1
  Top 0.254: JP8.2 37.17,29.47 35.7,28 31.05,28 29.85,26.8 T4.B
LED_RED
  Top 0.254: R25.2 37.12,60.32 JP9.2
MCLR
  Top 0.254: PIC32MZ.9 45.15,50.4 46.05,51.3 48.05,51.3 | 48.05,51.3 49.9,51.3 49.99,51.3 50,51.3 JP7.1 | R6.1 48.05,51.3
N$1
  Top 0.254: C1.1 18.6,44.05 18.6,44.84 18.91,45.15 MPU6050.10
N$2
  Top 0.254: C2.1 24.57,44.65 MPU6050.20
N$3
  Top 0.254: HMC5883.8 15.38,34.8 19,34.8 19.5,35.3 19.5,38.15 18.25,39.4 C11.1
N$4
  Top 0.254: C11.2 15.18,38.62 HMC5883.12
N$5
  Top 0.406: 30.85,18.85 LED.5 31.1,18.8 R29.2
N$6
  Top 0.254: HMC5883.10 16.7,36.55 17.9,37.75 18.1,37.75 C13.1
N$7
  Top 0.406: R28.2 27.9,20.8 29.3,19.4 LED.6
N$8
  Top 0.406: C16.1 16.3,60.4 15.6,61.1 L2.2
  Top 0.61: L2.2 14.3,60.8 U$2.2
N$9
  Top 0.406: C16.2 15.95,56.05 15.25,56.75 U$2.6
N$10
  Top 0.406: U$2.4 13.31,56.95 12.2,56.95 R1.1
N$11
  Top 0.406: R3.2 12,54.35 R1.2 12,54.5 R2.1
N$12
  Top 0.254: R7.2 30.45,40.85 | R7.2 30.85,40.65 | R7.2 30.75,41.45 28.75,43.45 28.75,46.4 PIC32MZ.48
N$13
  Top 0.254: R8.2 28.95,41.95 27.45,43.45 27.45,46.55 27.8,46.9 PIC32MZ.47
N$14
  Top 0.254: R9.2 U3.7
N$15
  Top 0.406: 32.9,18.9 LED.4 32.7,22.15 R27.2
N$16
  Top 0.254: 48.5,26.75 R9.1 48.8,26.85 LED1.A
N$17
  Top 0.254: PIC32MZ.18 37.75,56.9 37.95,57.1 38.55,57.1 38.85,57.4 38.85,59.05 R11.1
N$18
  Top 0.254: R13.2 27.25,41.95 26.65,42.55 26.65,47.1 27.45,47.9 PIC32MZ.45
N$19
  Top 0.254: R14.2 25.85,40.75 25.85,47.4 26.85,48.4 PIC32MZ.44
N$20
  Top 0.254: R25.1 32.95,60.25 32.25,59.55 PIC32MZ.29
N$21  (via drill 0.35)
  Top 0.254: v41.75,46.5 41.75,47.2 41.05,47.9 PIC32MZ.4
  Bottom 0.254: v41.75,46.5 43.55,46.5 45.7,44.35 R16.1
N$22  (via drill 0.35)
  Top 0.254: v40.75,44.9 40.75,46.4 PIC32MZ.1
  Bottom 0.254: R21.1 40.75,42.95 v40.75,44.9
N$23  (via drill 0.35)
  Top 0.254: v43.21,51.6 43.01,51.4 PIC32MZ.11
  Bottom 0.254: R17.1 44.26,52.65 v43.21,51.6
N$24
  Top 0.254: R18.1 44.4,53.1 | 44.33,53.03 R18.1 | R18.1 43.7,52.4 PIC32MZ.13
N$25  (via drill 0.35)
  Top 0.254: v44.55,51.59 43.86,50.9 PIC32MZ.10
  Bottom 0.254: R19.1 45.9,52.3 45.19,51.59 v44.55,51.59
N$26
  Top 0.254: R20.1 43.05,54.1 41.85,52.9 PIC32MZ.14
N$27
  Top 0.406: U7.3 14.95,14.34 15.35,14.75 R23.1
N$28
  Bottom 0.203: U8.3 29.89,25.05
  Bottom 0.406: 29.89,25.05 R24.1
N$29
  Bottom 0.406: SJ4.1 46.35,60.64 46.35,59.23 JP4.4
N$30
  Top 0.254: R26.1 42.45,45.05 42.45,47.2 41.25,48.4 PIC32MZ.5
N$31
  Top 0.254: R15.1 44.35,45 42.95,46.4 42.95,47.4 41.45,48.9 PIC32MZ.6
N$32
  Top 0.254: R31.1 10.35,49.2 11.4,49.2 U6.3
N$33
  Top 0.406: R30.1 25.45,63.1 U2.3
N$34
  Top 0.254: R12.1 31.75,61.45 PIC32MZ.30
N$35
  Top 0.254: JP8.3 34.63,29.83 33.5,28.7 30.7,28.7 30.3,29.1 27.8,29.1 26.95,28.25 T6.B
N$36  (via drill 0.35)
  Top 0.406: U$2.5 14.3,55.7 v14.2,55.6
  Bottom 0.406: R32.1 10.9,58.9 v14.2,55.6
N$37
  GND 0.254: 12.3,35.2 12.3,38.4 15.5,38.4 15.5,35.2 12.3,35.2
N$38
  VDD 0.254: 12.3,38.4 12.3,35.2 15.5,35.2 15.5,38.4 12.3,38.4
N$39
  Top 0.406: U2.5 27.45,59.25 C20.1 28.9,57.85 FB1.1
N$40
  Bottom 0.406: SJ1.1 54.65,60.94 54.65,58.97 JP5.3
N$41
  Bottom 0.406: SJ2.1 49.15,60.84 49.15,58.97 JP4.3
N$42
  Top 0.254: 27.8,25.4 T6.C
  Top 0.406: T6.C R28.1
N$43
  Top 0.406: R29.1 30.8,22.45 T4.C
N$44
  Top 0.406: 32.8,24.15 R27.1 32.9,24.7 T5.C
N$45
  Bottom 0.406: SJ3.1 51.85,60.74 51.85,59.23 JP5.4
PGC  (via drill 0.35)
  Top 0.254: v41.65,53.9 41.15,53.4 PIC32MZ.15
  Bottom 0.254: v41.65,53.9 41.25,53.5 41.25,49.7 42.35,48.6 43.55,48.6 47.85,44.3 47.85,43 49.02,41.83 | 49.06,41.79 49.02,41.83 | 49.02,41.83 50.62,41.83 JP7.5
PGD  (via drill 0.35)
  Top 0.254: PIC32MZ.16 40.75,53.9 40.75,54.5 v41.55,55.3
  Bottom 0.254: v41.55,55.3 42.45,54.4 42.45,50.9 48.92,44.42 49.02,44.33 JP7.4
SCL  (via drill 0.35)
  Top 0.254: MPU6050.23 23.85,46.15 24.5,46.8 v24.5,49.1 24.5,49.15 24.75,49.4 PIC32MZ.42 | HMC5883.1 11.26,38.92 v11.26,39 | 23.02,54.6 MS5611.8 v24.5,54.58
  Top 0.406: JP2.2 1.93,37.63 3.99,39.69 JP6.1
  Bottom 0.254: v24.5,54.58 v24.5,49.1 23.5,48.1 18.4,48.1 14.9,44.6 14.9,40.1 13.8,39 v11.26,39 10.1,39 R4.1
  Bottom 0.406: R4.1 8.34,39.05 JP6.1
SCL_J  (via drill 0.35)
  Top 0.406: 39.2,18.6 U3.12 38.2,18.6 35.7,16.1 35.7,10.94 30.86,6.1 16,6.1 14.2,4.3 v8,4.3 | JP12.2 1.93,3.63 6.45,8.14 U1.1
  Bottom 0.406: v8,4.3 6.8,5.5 3.8,5.5 1.93,3.63 JP12.2
SDA  (via drill 0.35)
  Top 0.254: v13.1,40.64 13.15,40.59 HMC5883.16 | MPU6050.24 23.27,49.07 23.3,49.1 | 23.3,49.1 v21,49.1 | 23.3,49.1 24.1,49.9 24.5,49.9 | 24.5,49.9 PIC32MZ.41 | 24.5,49.9 24.5,52.3 23.48,53.33 MS5611.7
  Bottom 0.254: v21,49.1 15.56,49.1 12.55,46.09 12.55,42.45 | R5.1 12.55,42.45 | v13.1,40.64 13.1,41.9 12.55,42.45
  Bottom 0.406: JP2.1 4.47,39.97 6.73,42.23 JP6.2 11.43,42.23 R5.1
SDA_J
  Top 0.406: U3.9 44.6,24.5 43.6,25.5 39.2,25.5 34.5,20.8 34.5,12.55 29.05,7.1 15.4,7.1 13.6,5.3 9,5.3 | 9,5.3 7.1,5.3 | 7.1,5.3 7.08,5.32 | U1.3 8.95,5.35 9,5.3 | 7.1,5.3 7.07,5.3 JP12.1
V+  (via drill 0.35)
  Top 0.406: XB2.1 5.65,26.6 C18.1 11.95,20.4 11.95,19.4 | 11.95,19.4 C15.1 11.95,18.5 | U1.4 10.6,10.66 C25.1 10.9,16.5 11.26,16.86 11.9,16.86 | 11.9,16.86 U7.5 | 11.95,18.5 11.95,16.91 11.9,16.86 | v9.6,19.4 v10.6,19.4 11.95,19.4 | v9.6,18.5 v10.6,18.5 11.95,18.5
  pour VDD (isolate 0.254, rank 2, no thermals): 0,33.2 0,0 25,0 25,33.2
VCC  (via drill 0.35)
  Top 0.254: HMC5883.4 11.65,36.05 11.2,36.5 11.2,37 | HMC5883.2 11.25,37.05 11.2,37 | MPU6050.13 20.05,42.6 C4.1 19,42.2 18.4,41.6 14.65,41.6 | C3.1 18.6,46.95 18.6,46.4 18.85,46.15 MPU6050.8 | 11.2,37 10.4,37.8 10.4,40.2 11.8,41.6 14.65,41.6 | C12.1 14.65,42.7 14.65,41.6 | HMC5883.13 14.65,41.6
  Top 0.406: 17.45,48.09 C3.1 17.4,47.85 | 19.4,53.35 17.45,51.4 C14.1 17.45,48 | MS5611.1 20.07,54.58 19.4,53.9 19.4,53.35 | 19.4,53.35 19.4,53.3 20.57,53.3 MS5611.2 | C12.1 14.65,42.9 C23.1 14.65,46.39 14.7,46.45 v14.6,46.45 | 17.45,47.95 17.45,48 | 17.45,48 17.5,47.95 17.4,47.85 | 17.4,47.85 15.99,46.45 v14.6,46.45 | v14.6,46.45 U6.5
  Bottom 0.254: R4.2 R5.2 12.6,39.8 13.6,39.8 14.09,40.29 14.09,45.94 v14.6,46.45
VDD  (via drill 0.35)
  Top 0.406: U3.17 44.55,10.05 C33.1 44.55,7.05 44.5,7 | U3.2 53.15,14.85 C27.1 55.2,15.3 | U3.3 55.05,16.7 C31.1 55.2,16.4 | 55.2,15.3 55.2,16.4 | 55.2,16.4 v56.3,16.4 | 44.15,7.05 v44.1,7 44.5,7 | 44.5,7 v45,7 | 55.2,15.3 v56.3,15.3
  Bottom 0.406: C19.1 27.05,21 U8.5 | 27.25,20.8 C19.1 | 27.3,19.2 v26.8,19.2 v26.8,18.3 v27.7,18.3 v27.7,19.2 27.3,19.2 | 27.3,19.2 27.35,19.25 C19.1
  pour VDD (isolate 0.254, no thermals): 25,33.2 25,0 58,0 58,33.2
XBEE_RX
  Top 0.254: R8.1 28.62,38.52 28.62,37.2 28.42,37 JP11.3
XBEE_RX_J  (via drill 0.35)
  Top 0.406: v21.3,4.9 24.6,4.9 25.88,3.62 JP1.2
  Bottom 0.406: XB2.3 13.1,22.6 20.4,15.3 20.4,5.7 21.2,4.9 v21.3,4.9
XBEE_TX
  Top 0.254: R7.1 30.75,36.41 JP11.4
XBEE_TX_J
  Bottom 0.406: XB2.2 14.7,24.6 22.4,16.9 22.4,7.6 23.34,6.66 JP1.1

## Text on the board
tPlace: +3.3 | RG6 | RE5 | RG7 | RG8 | GND
tNames: v5 | + | 5V | GND | SDA | SCL
bNames: 5V jumper